# Altium PCB ARE134H.PcbDoc
Units mm, origin at the board's own origin, x right, y up, seen from the top; angles counter-clockwise.
Board outline 72.36 x 76.96 mm, 2 copper layers (Top Layer, Bottom Layer); 18 components, 15 nets, 90 pads, 0 vias.
Unrouted connection lines stored in the file: 8.
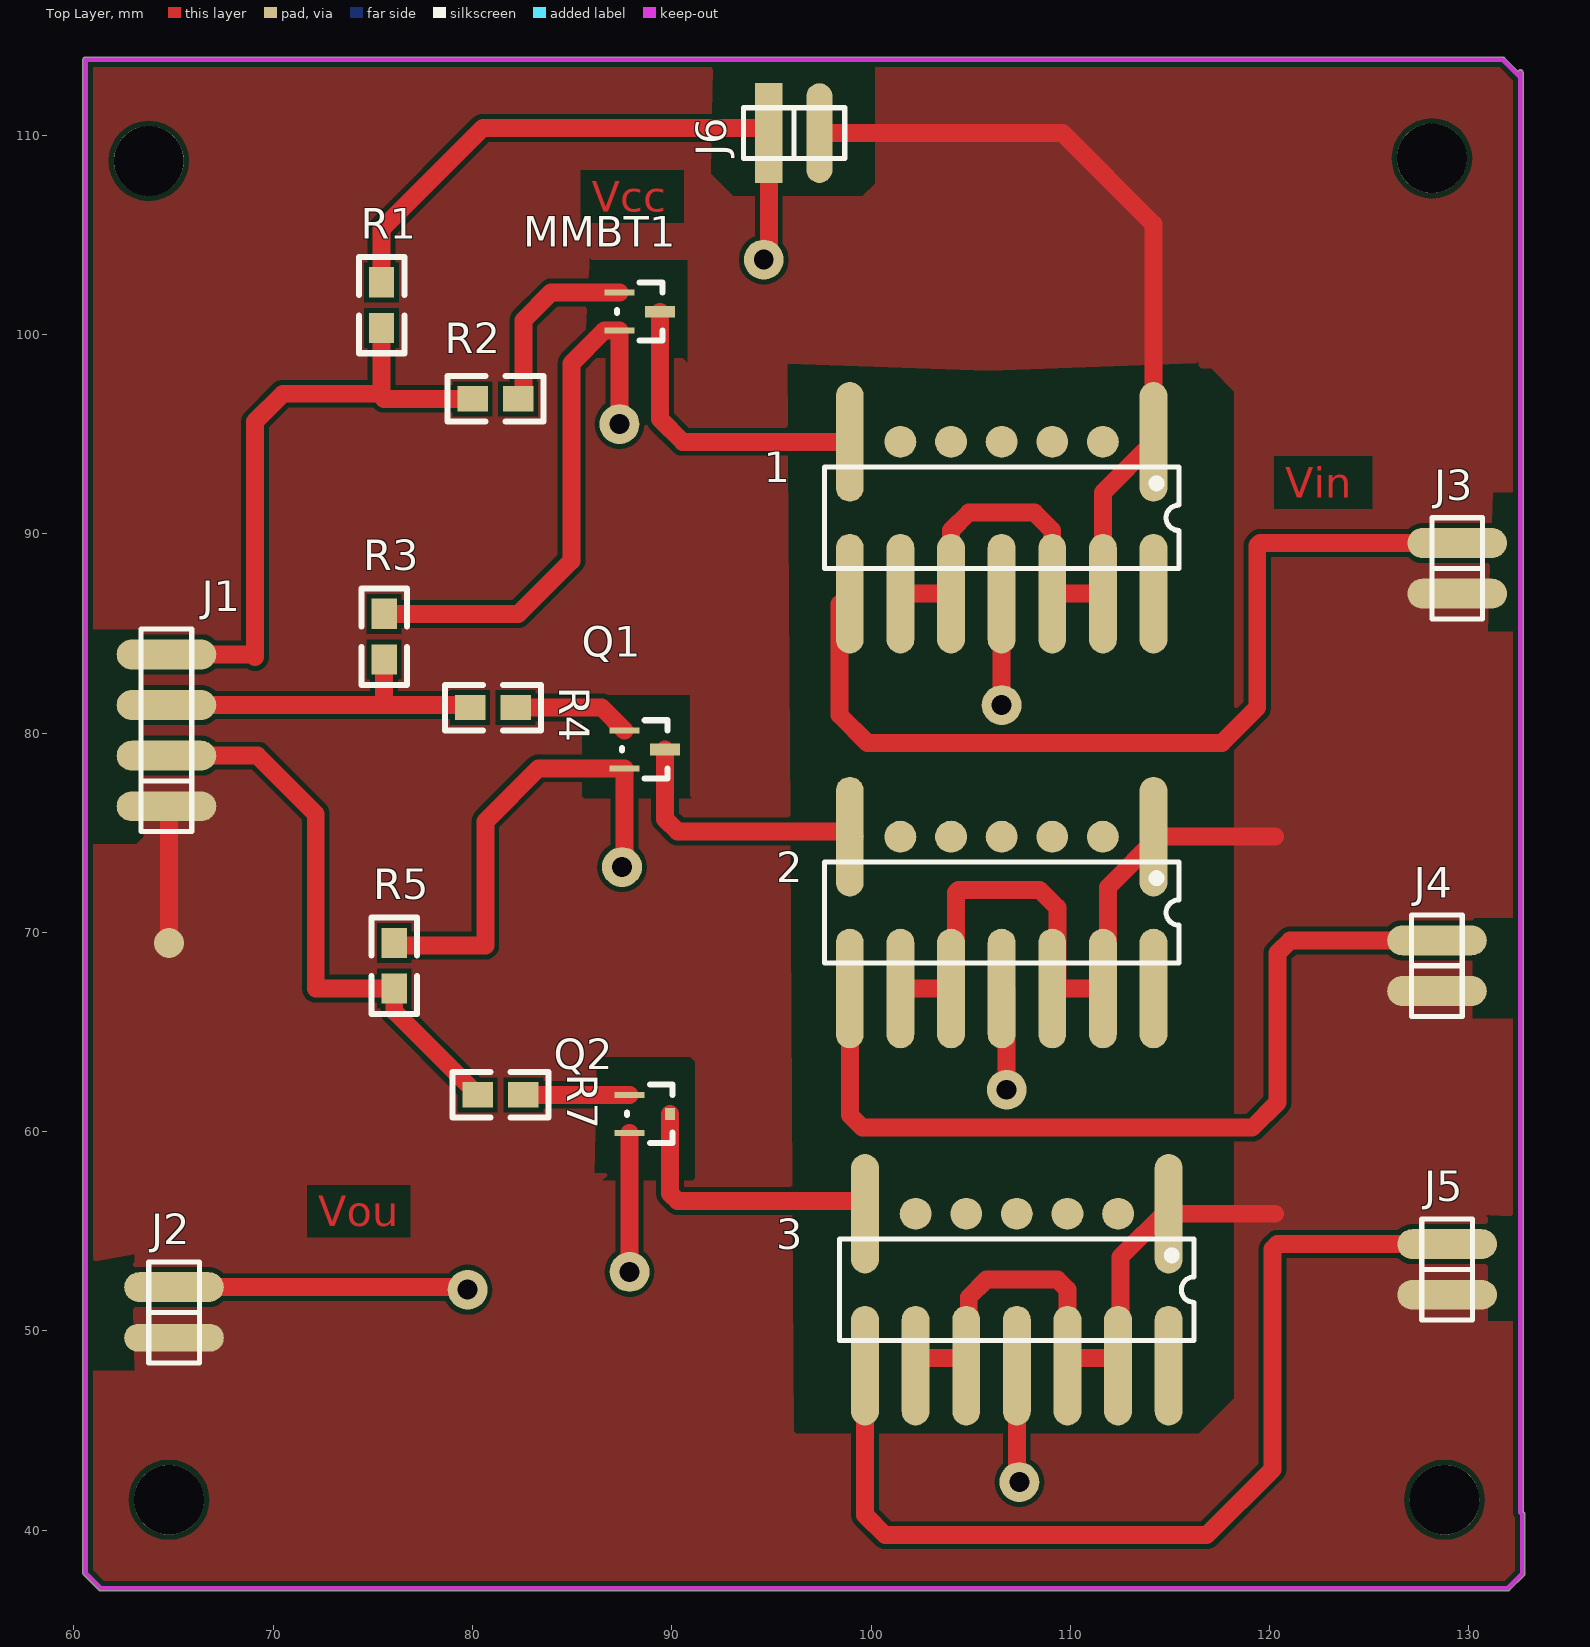
[diagram p0: Top Layer view]
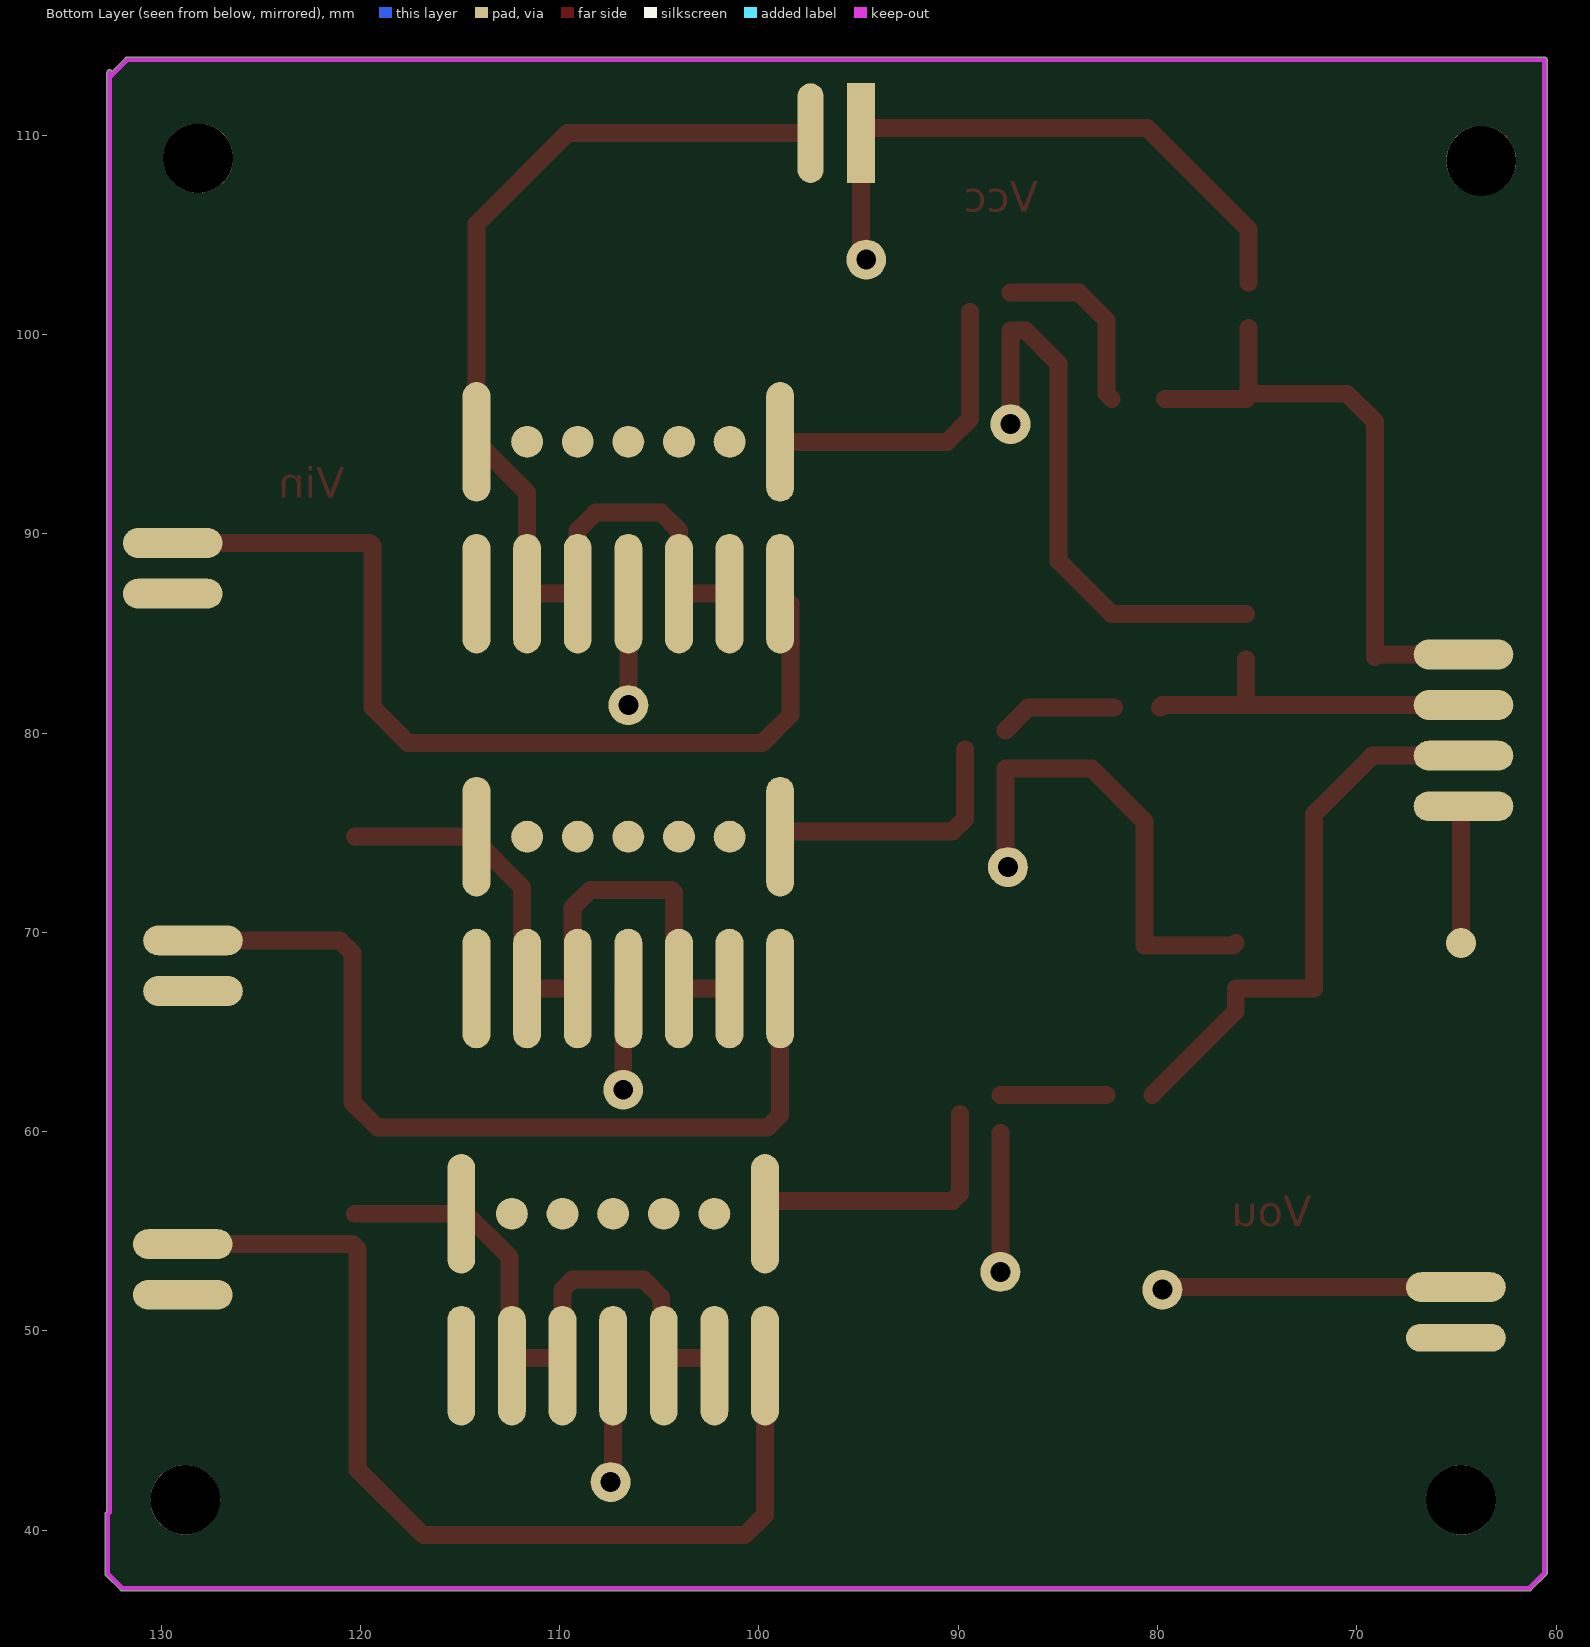
[diagram p1: Bottom Layer view, seen from below]
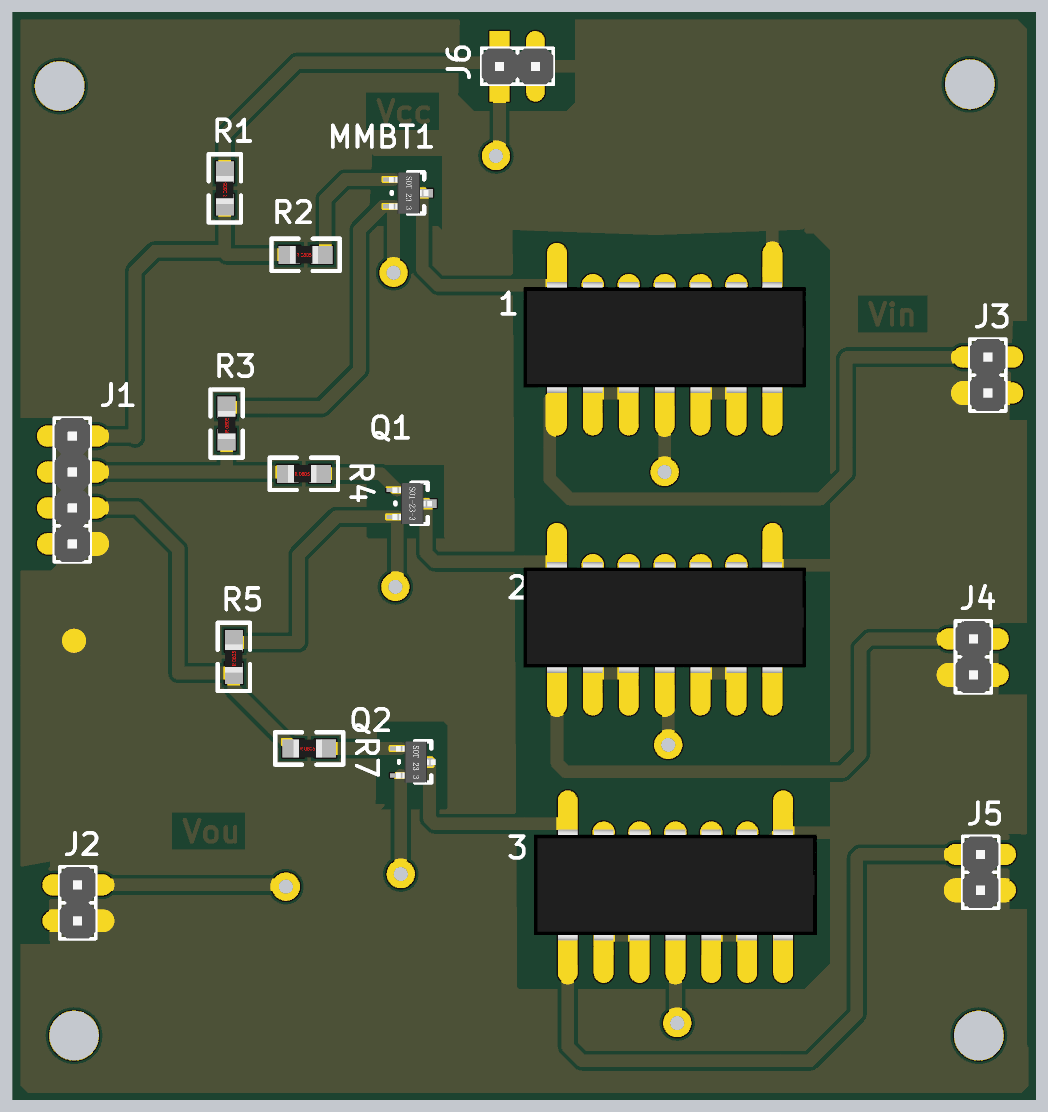
[diagram p2: 3D render of the assembled board from above, using the file's embedded part models]

## Layer stack, top to bottom
Top Solder: solder mask 0.0102, Solder Resist, Dk 3.5
Top Layer: signal copper 0.0356
Dielectric 1: dielectric 0.32, FR-4, Dk 4.8
Bottom Layer: signal copper 0.0356
Bottom Solder: solder mask 0.0102, Solder Resist, Dk 3.5

## Board outline
60.489,37.756 61.251,36.994 61.25,36.994 ccw(c61.341,37.084) 61.341,36.957 131.953,36.957 ccw(c131.953,37.084) 132.044,36.994 132.043,36.994 132.776,37.726 132.775,37.726 ccw(c132.686,37.817) 132.813,37.817 132.813,40.796 ccw(c132.686,40.796) 132.715,40.92 132.715,113.157 ccw(c132.588,113.157) 132.469,113.202 131.789,113.882 131.79,113.882 ccw(c131.699,113.792) 131.699,113.919 60.579,113.919 ccw(c60.579,113.792) 60.452,113.792 60.452,37.846 ccw(c60.579,37.846)

## Design rules (kind name [scope] priority, off if disabled: settings)
Clearance [All] p1: gap=0.254
PlaneConnect [All] p1: planeconnectstyle=Direct reliefexpansion=0.508 reliefentries=4 reliefconductorwidth=0.254 reliefairgap=0.254
PolygonConnect [All] p1: connectstyle=Direct reliefconductorwidth=0.254 reliefentries=4 polygonreliefangle="90 Angle" airgapwidth=0.254
RoutingVias [All] p1: holewidth=0.711 width=1.27 viastyle="Through Hole" minholewidth=0.711 minwidth=1.27 maxholewidth=0.711 maxwidth=1.27
SolderMaskExpansion [All] p1: expansion=0.102
Width [All] p1: maxlimit=2 minlimit=0.254 preferedwidth=0.9 bottomlayer_maxwidth=0.254 bottomlayer_prefwidth=0.254 minimp=50.000000 maximp=50.000000 favimp=50.000000
29 further rules are at their usual default settings.

## Components (designator, comment, footprint, x,y, rotation, side; value= is the part's Value field where it differs from the comment)
1 "ARE134H" DIP14 114.173,94.615 r270 top
2 "ARE134H" DIP14 114.173,74.803 r270 top
3 "ARE134H" DIP14 114.935,55.88 r270 top
J1 "Pin HDR1X4" "Pin HDR1X4/2.54mm-S" 64.643,76.327 r180 top
J2 "Pin HDR1X2" "Pin HDR1X2/2.54mm-S"#1 65.024,52.197 r0 top
J3 "Pin HDR1X2" "Pin HDR1X2/2.54mm-S"#2 129.413,89.535 r0 top
J4 "Pin HDR1X2" "Pin HDR1X2/2.54mm-S"#2 128.397,69.596 r0 top
J5 "Pin HDR1X2" "Pin HDR1X2/2.54mm-S"#2 128.905,54.356 r0 top
J6 "Pin HDR1X2" "Pin HDR1X2/2.54mm-S"#3 94.869,110.109 r90 top
MMBT1 "PNP" SOT-23#1 88.265,101.219 r270 top
Q1 "PNP" SOT-23#1 88.519,79.248 r270 top
Q2 "PNP" SOT-23#2 88.773,60.96 r270 top
R1 "RES" 0805R 75.438,100.33 r90 top
R2 "RES" 0805R 80.01,96.774 r0 top
R3 "RES" 0805R 75.565,83.693 r90 top
R4 "RES" 0805R 79.883,81.28 r0 top
R5 "RES" 0805R 76.073,67.183 r90 top
R7 "RES" 0805R 80.264,61.849 r0 top

## Footprints (in the part's own frame and the unit in brackets; to place one, negate y for a bottom-side part, rotate by r counter-clockwise, add the part's x,y. Pads: shape width x height; smd on the part's side, far side on the other; paste and mask are expansions set on the pad)
0805R [mil]
  rect 60x50 smd: 1(0,0) 2(90,0)
  silkscreen extent -50,-45 140,45, body extent 1,-25 80,25, height 15
DIP14 [mm]
  oval 6x1.4 all layers, no hole: 1(0,0) 7(0,-15.24) 8(7.62,-15.24) 9(7.62,-12.7) 10(7.62,-10.16) 11(7.62,-7.62) 12(7.62,-5.08) 13(7.62,-2.54) 14(7.62,0)
  round 1.6 all layers, no hole: 2(0,-2.54) 3(0,-5.08) 4(0,-7.62) 5(0,-10.16) 6(0,-12.7)
  silkscreen extent 1.27,-16.51 6.35,1.27, body extent -0.25,-17.62 7.62,2.38, height 5.1
"Pin HDR1X2/2.54mm-S"#1 [mm]
  oval 5x1.5 all layers, no hole: 1(0,0)
  oval 5x1.4 all layers, no hole: 2(0,-2.54)
  silkscreen extent -1.27,-3.81 1.27,1.27, body extent -1.27,-3.81 1.27,1.27, height 8.54
"Pin HDR1X2/2.54mm-S"#2 [mm]
  oval 5x1.5 all layers, no hole: 1(0,0) 2(0,-2.54)
  silkscreen extent -1.27,-3.81 1.27,1.27, body extent -1.27,-3.81 1.27,1.27, height 8.54
"Pin HDR1X2/2.54mm-S"#3 [mm]
  rect 5x1.4 all layers, no hole: 1(0,0)
  oval 5x1.3 all layers, no hole: 2(0,-2.54)
  silkscreen extent -1.27,-3.81 1.27,1.27, body extent -1.27,-3.81 1.27,1.27, height 8.54
"Pin HDR1X4/2.54mm-S" [mm]
  oval 5x1.5 all layers, no hole: 1(0,0) 2(0,-2.54) 3(0,-5.08) 4(0,-7.62)
  silkscreen extent -1.27,-8.89 1.27,1.27, body extent -1.27,-8.89 1.27,1.27, height 8.54
SOT-23#1 [mm]
  rect 0.3x1.5 smd: B(-0.889,-0.889) E(1.016,-0.889)
  rect 0.6x1.5 smd: C(0.076,1.143)
  silkscreen extent -1.4,-1.02 1.52,1.27, body extent -1.37,-1.22 1.53,1.58, height 1.2
SOT-23#2 [mm]
  rect 0.3x1.5 smd: B(-0.889,-0.889) E(1.016,-0.889)
  rect 0.6x0.5 smd: C(0.076,1.143)
  silkscreen extent -1.4,-1.02 1.52,1.27, body extent -1.37,-1.22 1.53,1.58, height 1.2

## Part data
1 2 3: library part Component_1
MMBT1 Q1 Q2: "PNP三极管"

## Free pads (board coordinates)
  round 2 hole 1: 4(87.884,52.959) 5(87.503,73.279) 6(87.376,95.504) 7(94.615,103.759) 9(106.553,81.407) 10(106.807,62.103) 19(79.756,52.07)
  round 2 hole 1 paste+0: 11(107.442,42.418)
  round 3.5 hole 3.5: 12(128.778,41.529) 13(128.143,108.839) 14(63.754,108.712) 15(64.77,41.529)
  round 1.5 all layers, no hole: 17(64.77,69.469)

## Nets (pads, with @x,y where several pads share a name; then routed paths per layer and width w, separated by ;. In a path a pad name is that pad's centre, name@x,y a point inside that pad or via, vN(x,y) a via of type N, cw(c..) or ccw(c..) an arc to the next point about the centre after c; other vN are vias at no path point)
GND: 1.1 1.9 1.10 1.12 1.13 2.1 2.9 2.10 2.12 2.13 3.1 3.9 3.10 3.12 3.13 J1.1 J2.2 J3.2 J4.2 J5.2 J6.2 pad.17 | length 128
  Top Layer w0.9: pad.17 J1.1@64.77,76.2 ; J6.2 109.22,110.109 109.601,110.109 114.173,105.537 1.1 111.633,92.075 1.13 1.12 109.093,90.17 108.204,91.059 104.902,91.059 104.013,90.17 1.10 1.9 ; 2.9@101.727,67.183 104.267,67.183 104.267,72.009 104.394,72.136 108.458,72.136 109.347,71.247 109.347,67.183 111.887,67.183 111.887,72.263 2.1@114.427,74.803 ; 3.9@102.362,48.641 104.902,48.641 104.902,51.689 105.791,52.578 109.347,52.578 109.855,52.07 3.12 ; 3.12@109.982,48.641 112.522,48.641 112.522,53.721 114.935,56.134 3.1 120.269,55.88 ; 2.1 2.1@114.427,74.803 ; 120.269,74.803 2.1@114.427,74.803
Net1_7: 1.7 MMBT1.C | length 15.4
  Top Layer w0.9: MMBT1.C 89.408,95.758 90.551,94.615 1.7
Net1_8: 1.8 J3.1 | length 46.8
  Top Layer w0.9: 1.8 98.425,86.487 98.425,80.899 99.822,79.502 117.602,79.502 119.38,81.28 119.38,89.408 119.507,89.535 J3.1
Net1_11: 1.11 2.11 3.11 J2.1 pad.9 pad.10 pad.11 pad.19 | length 31.1
  Top Layer w0.9: J2.1@64.897,52.324 J2.1 79.629,52.197 pad.19 ; pad.9@106.553,81.788 1.11 ; pad.10 2.11@106.807,67.183 ; 3.11 107.315,42.545 pad.11
Net2_7: 2.7 Q1.C | length 13.4
  Top Layer w0.9: Q1.C 89.662,75.692 90.297,75.057 98.933,75.057 2.7@99.187,74.803
Net2_8: 2.8 J4.1 | length 44.4
  Top Layer w0.9: 2.8 98.933,60.833 99.568,60.198 119.126,60.198 120.396,61.468 120.396,68.961 121.031,69.596 J4.1
Net3_7: 3.7 Q2.C | length 14.2
  Top Layer w0.9: Q2.C 89.916,56.896 90.297,56.515 99.568,56.515 3.7@99.822,56.261
Net3_8: 3.8 J5.1 | length 49.8
  Top Layer w0.9: 3.8@99.822,48.133 3.8 99.695,40.767 100.711,39.751 106.045,39.751 116.84,39.751 120.142,43.053 120.142,54.102 120.396,54.356 J5.1
NetJ1_2: J1.2 R5.1 R7.1 | length 28.5
  Top Layer w0.9: J1.2 69.215,78.867 72.136,75.946 72.136,67.183 R5.1 76.073,66.04 R7.1
NetJ1_3: J1.3 R3.1 R4.1 | length 17.6
  Top Layer w0.9: J1.3 75.438,81.407 ; R3.1 75.565,81.534 75.438,81.407 ; R4.1 79.756,81.407 75.438,81.407
NetJ1_4: J1.4 R1.1 R2.1 | length 30.9
  Top Layer w0.9: J1.4 68.961,83.947 69.088,83.82 69.088,95.631 70.485,97.028 75.311,97.028 ; R1.1 75.438,97.155 75.311,97.028 ; R2.1@79.629,96.774 75.565,96.774 75.311,97.028
NetMMBT1_B: MMBT1.B R2.2 | length 9.4
  Top Layer w0.9: R2.2 82.55,97.028 82.55,100.711 83.947,102.108 MMBT1.B
NetQ1_B: Q1.B R4.2 | length 5.9
  Top Layer w0.9: R4.2 86.487,81.28 Q1.B
NetQ2_B: Q2.B R7.2 | length 5.3
  Top Layer w0.9: R7.2 Q2.B
VCC: J6.1 MMBT1.E pad.4 pad.5 pad.6 pad.7 Q1.E Q2.E R1.2 R3.2 R5.2 | length 89.3
  Top Layer w0.9: R1.2 75.438,105.283 80.518,110.363 J6.1@94.615,110.363 ; R3.2 82.296,85.979 84.963,88.646 84.963,98.552 86.614,100.203 MMBT1.E pad.6 ; R5.2 76.2,69.342 80.645,69.342 80.645,75.565 83.312,78.232 Q1.E 87.63,73.406 pad.5 ; pad.4@87.884,53.213 Q2.E ; pad.7 94.869,104.013 J6.1
pads on no net: 1.2 1.3 1.4 1.5 1.6 1.14 2.2 2.3 2.4 2.5 2.6 2.14 3.2 3.3 3.4 3.5 3.6 3.14

## Polygon pours and split planes (outlines as drawn)
GND on Top Layer "Top Layer-No Net" (solid, remove dead copper, pour order 52): 55.499,116.459 136.017,116.459 137.033,115.443 137.033,18.923 138.43,17.526 138.303,17.653 138.303,18.034 60.198,18.034 49.149,29.083

## Keep-outs
Keep-Out Layer:
  lines w0.254: 132.588,40.894 132.588,113.157 ; 132.588,112.903 131.699,113.792 131.445,113.792 60.579,113.792 60.579,37.846 61.341,37.084 61.849,37.084 128.778,37.084 131.953,37.084 132.686,37.817 132.686,40.796

## Other copper
Top Layer:
  pour cut-out: 95.796,98.53 105.918,98.171 116.317,98.552 116.444,98.679 116.444,98.425 116.571,98.298 117.079,98.298 118.237,97.14 118.237,46.624 116.444,44.831 96.251,44.831 96.124,44.958
  pour cut-out: 86.233,63.627 86.36,63.754 90.932,63.754 91.186,63.5 91.186,57.658 91.059,57.531 86.487,57.531 86.868,57.912 86.106,57.912
  pour cut-out: 60.579,85.217 63.246,85.217 63.5,84.963 63.5,74.803 63.119,74.422 60.579,74.422
  pour cut-out: 130.81,55.816 130.937,55.689 130.937,50.482 133.858,50.482 134.112,50.736 134.112,55.689
  pour cut-out: 92.075,113.919 99.949,113.919 100.203,113.665 100.203,107.569 99.568,106.934 93.091,106.934 91.948,108.077
  pour cut-out: 86.614,81.915 90.932,81.915 90.932,76.835 91.059,76.708 85.598,76.708 85.471,76.835 85.471,81.153 84.963,81.661
  pour cut-out: 85.852,103.378 85.852,103.886 85.979,103.759 90.805,103.759 90.805,98.552 90.551,98.806 85.598,98.806
  pour cut-out: 63.055,48.006 60.261,48.006 60.261,51.054 60.261,53.34 63.055,53.848 63.055,53.467 62.928,53.34
  pour cut-out: 130.175,70.612 130.302,70.739 132.207,70.739 132.588,70.358 132.588,65.786 132.461,65.659 130.175,65.659
  pour cut-out: 131.191,92.075 132.842,92.075 132.842,90.424 132.842,85.09 130.937,85.09
  text "Vcc" at 85.979,106.172 h1.52
  text "Vin" at 120.777,91.821 h1.52
  text "Vou" at 72.263,55.245 h1.52